# Altium PCB PCB2.PcbDoc
Units mm, origin at the board's own origin, x right, y up, seen from the top; angles counter-clockwise.
Board outline 28 x 43 mm, 2 copper layers (Top Layer, Bottom Layer); 46 components, 38 nets, 124 pads, 20 vias.
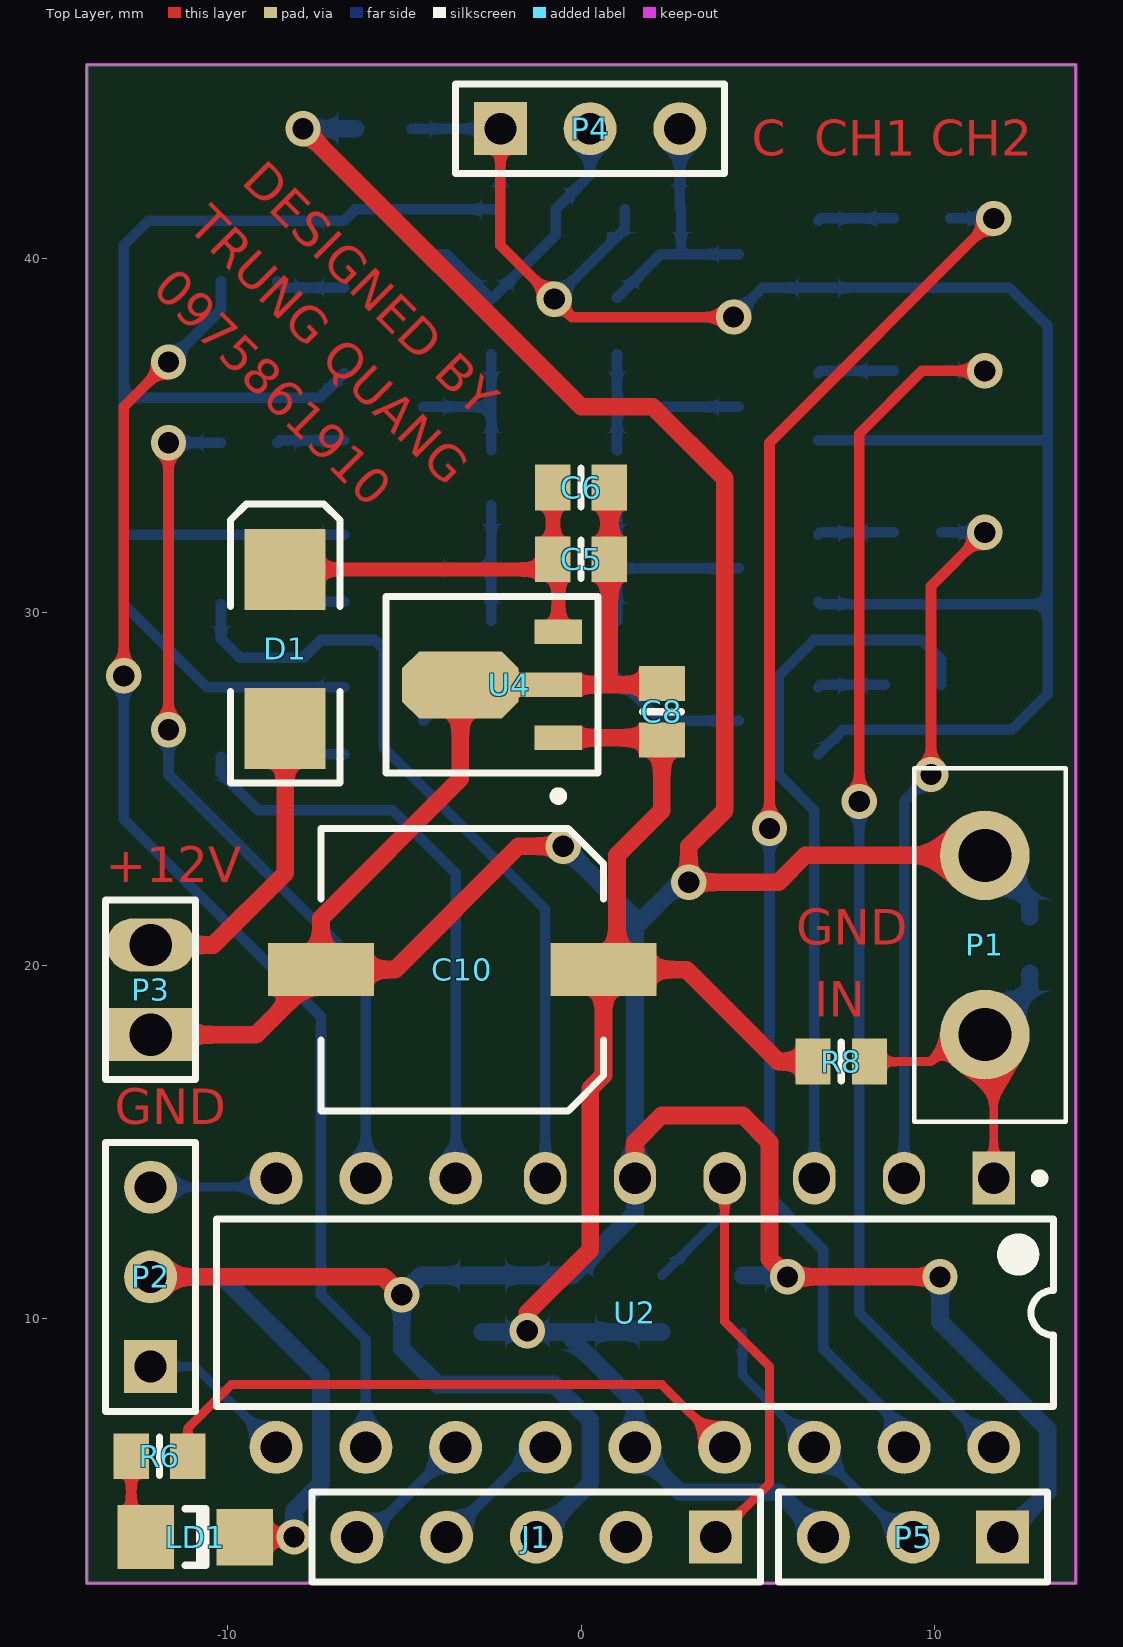
[diagram p0: Top Layer view]
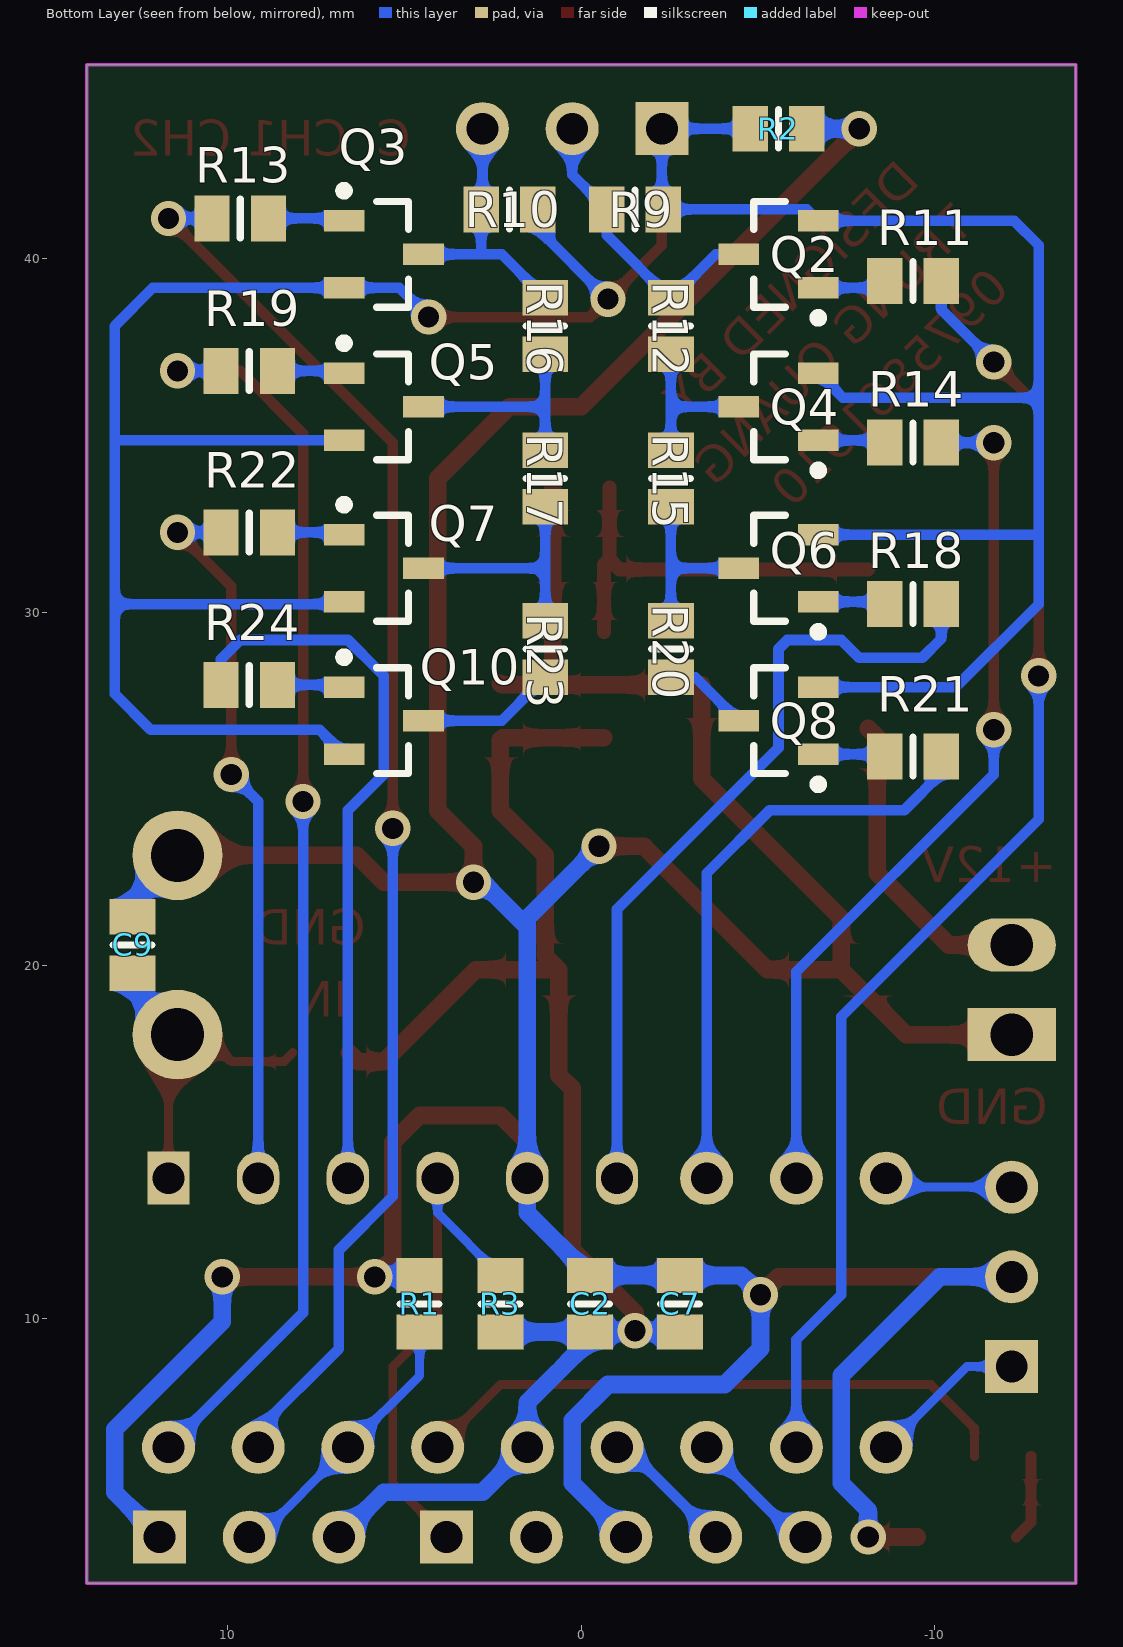
[diagram p1: Bottom Layer view, seen from below]

## Layer stack, top to bottom
Top Solder: solder mask 0.0102, Solder Resist, Dk 3.5
Top Layer: signal copper 0.0356
Dielectric1: dielectric 0.32, FR-4, Dk 4.8
Bottom Layer: signal copper 0.0356
Bottom Solder: solder mask 0.0102, Solder Resist, Dk 3.5

## Board outline
-14,2.5 -14,45.5 14,45.5 14,2.5

## Design rules (kind name [scope] priority, off if disabled: settings)
Clearance [All] p1: gap=0.254
HoleToHoleClearance [All] p1 off: gap=0.254 allowstackedmicrovias=TRUE
MinimumSolderMaskSliver [All] p1 off: minsoldermaskwidth=0.254
PolygonConnect [All] p1: connectstyle=Direct reliefconductorwidth=0.254 reliefentries=4 polygonreliefangle="90 Angle" airgapwidth=0.254
RoutingVias [All] p1: holewidth=0.711 width=1.27 viastyle="Through Hole" minholewidth=0.5 minwidth=1 maxholewidth=3 maxwidth=2
SilkToSolderMaskClearance SilkscreenOverComponentPads [IsPad] p1 off: minsilkscreentomaskgap=0.254 clearancetoexposedcopper=TRUE
SolderMaskExpansion [All] p1: expansion=0.102
Width [All] p1: maxlimit=2 minlimit=0.254 preferedwidth=0.3
27 further rules are at their usual default settings.

## Components (designator, comment, footprint, x,y, rotation, side; value= is the part's Value field where it differs from the comment)
C2 "Cap Semi" RESC2012L -0.254,10.414 r270 bottom
C5 "Cap Semi" RESC2012L 0,31.496 r180 top
C6 "Cap Semi" RESC2012L 0,33.528 r180 top
C7 "Cap Semi" RESC2012L -2.794,10.414 r270 bottom
C8 "Cap Semi" RESC2012L 2.286,27.178 r270 top
C9 "Cap Semi" RESC2012L 12.7,20.574 r270 bottom
C10 "EEE-FT1A102AP" CAP8x8 -7.366,23.876 r0 top
D1 "SS34" SMB -8.382,28.956 r270 top
J1 "programer" HDR1x5 3.81,3.81 r180 top
LD1 "LNJ911W8BRU" CD3216-1206 -10.922,3.81 r0 top
P1 "Header 2" CON_PLUG2 11.43,20.574 r90 top locked
P2 "Header 3" HDR1X3 -12.192,8.636 r90 top
P3 "Header 2" HDR1X2 -12.192,18.034 r90 top
P4 "tocdplayer" HDR1X3 -2.286,43.688 r0 top
P5 "JUMP" HDR1X3 11.938,3.81 r180 top
Q2 "NPN" SOT-23B -5.588,40.132 r180 bottom
Q3 "NPN" SOT-23B 5.588,40.132 r0 bottom
Q4 "NPN" SOT-23B -5.588,35.814 r180 bottom
Q5 "NPN" SOT-23B 5.588,35.814 r0 bottom
Q6 "NPN" SOT-23B -5.588,31.242 r180 bottom
Q7 "NPN" SOT-23B 5.588,31.242 r0 bottom
Q8 "NPN" SOT-23B -5.588,26.924 r180 bottom
Q10 "NPN" SOT-23B 5.588,26.924 r0 bottom
R1 "Res3" RESC2012L 4.572,10.414 r90 bottom
R2 "Res3" RESC2012L -5.588,43.688 r180 bottom
R3 "Res3" RESC2012L 2.286,10.414 r90 bottom
R6 "Res3" RESC2012L -11.938,6.096 r180 top
R8 "Res3" RESC2012L 7.366,17.272 r0 top
R9 "Res3" RESC2012L -1.524,41.402 r0 bottom
R10 "Res3" RESC2012L 2.032,41.402 r0 bottom
R11 "Res3" RESC2012L -9.398,39.37 r0 bottom
R12 "Res3" RESC2012L -2.54,38.1 r90 bottom
R13 "Res3" RESC2012L 9.652,41.148 r0 bottom
R14 "Res3" RESC2012L -9.398,34.798 r0 bottom
R15 "Res3" RESC2012L -2.54,33.782 r90 bottom
R16 "Res3" RESC2012L 1.016,38.1 r90 bottom
R17 "Res3" RESC2012L 1.016,33.782 r90 bottom
R18 "Res3" RESC2012L -9.398,30.226 r0 bottom
R19 "Res3" RESC2012L 9.398,36.83 r0 bottom
R20 "Res3" RESC2012L -2.54,28.956 r90 bottom
R21 "Res3" RESC2012L -9.398,25.908 r0 bottom
R22 "Res3" RESC2012L 9.398,32.258 r0 bottom
R23 "Res3" RESC2012L 1.016,28.956 r90 bottom
R24 "Res3" RESC2012L 9.398,27.94 r0 bottom
U2 "PIC18F1220-E/P" PDIP300-P18 1.524,10.16 r270 top locked
U4 "µA78L05ACPKR" PK03 -2.032,27.94 r270 top

## Footprints (in the part's own frame and the unit in brackets; to place one, negate y for a bottom-side part, rotate by r counter-clockwise, add the part's x,y. Pads: shape width x height; smd on the part's side, far side on the other; paste and mask are expansions set on the pad)
CAP8x8 [mm]
  rect 3x1.5 smd: 1(8,-4) 2(0,-4)
  silkscreen extent 0,-8 8,0
CD3216-1206 [mm] "Chip Diode; Body 3.2 x 1.6 mm (LxW typ)"
  rect 1.6x1.8 smd: 1(-1.4,0)
  rect 1.6x1.6 smd: 2(1.4,0)
  silkscreen extent -0.3,-0.8 0.3,0.8
CON_PLUG2 [mm]
  round 2.54 hole 1.5: 1(-2.54,0) 2(2.54,0)
  silkscreen extent -5,-2.29 5,2
HDR1X2 [mm] "Connector; Header; 2 Position"
  rect 1.5x2.5 hole 1.2: 1(0,0)
  oval 1.5x2.5 hole 1.2: 2(2.54,0)
  silkscreen extent -1.27,-1.27 3.81,1.27
HDR1X3 [mm] "Connector; Header; 3 Position"
  rect 1.5x1.5 hole 0.9: 1(0,0)
  round 1.5 hole 0.9: 2(2.54,0) 3(5.08,0)
  silkscreen extent -1.27,-1.27 6.35,1.27
HDR1x5 [mm] "Connector; Header; 5 Position"
  rect 1.5x1.5 hole 0.9: 1(0,0)
  round 1.5 hole 0.9: 2(2.54,0) 3(5.08,0) 4(7.62,0) 5(10.16,0)
  silkscreen extent -1.27,-1.27 11.43,1.27
PDIP300-P18 [mm] "DIP, 18-Leads, Row Spacing 7.62mm, Pitch 2.54mm, Body 22.9x6.6mm"
  rect 1.5x1.2 hole 0.9: 1(-3.81,10.16)
  oval 1.5x1.2 hole 0.9: 2(-3.81,7.62) 3(-3.81,5.08) 4(-3.81,2.54) 5(-3.81,0) 6(-3.81,-2.54)
  round 1.5 hole 0.9: 7(-3.81,-5.08) 8(-3.81,-7.62) 9(-3.81,-10.16) 10(3.81,-10.16) 11(3.81,-7.62) 12(3.81,-5.08) 13(3.81,-2.54) 14(3.81,0) 15(3.81,2.54) 16(3.81,5.08) 17(3.81,7.62) 18(3.81,10.16)
  silkscreen extent -3.93,-11.85 2.65,11.85, body extent -3.6,-11.8 3.6,11.8, height 5.34
PK03 [mm] "SOT-89; Body 4.6 x 4.25 mm, inc. leads (LxW max)"
  rect 0.7x1.35 smd: 1(1.5,1.388) 3(-1.5,1.388)
  rect 0.7x1.8 smd: 2(0,1.162)
  oct 1.9x3.3 smd: 4(0,-1.388)
  silkscreen extent -2.5,-3.49 3.27,2.51
RESC2012L [mm] "Chip Resistor, Body 2.0x1.3mm, IPC High Density"
  rect 1x1.3 smd: 1(-0.8,0) 2(0.8,0)
  silkscreen extent 0,-0.55 0,0.55, body extent -1.07,-0.7 1.07,0.7, height 0.65
SMB [mm] "DO-214-AA/SMB; 2 C-Bend Leads; Body 5.3 x 3.6 mm, inc. leads (LxW)"
  rect 2.3x2.3 smd: 1(2.25,0) 2(-2.25,0)
  silkscreen extent -4.1,-1.55 3.8,1.55
SOT-23B [mm] "SOT23, 3-Leads, Body 2.9x1.3mm, Pitch 0.95mm, Lead Span 2.4mm, IPC Medium Density"
  rect 1.15x0.6 smd: 1(-1.125,0) 2(1.125,-0.95) 3(1.125,0.95)
  silkscreen extent -0.7,-1.92 1.25,1.5, body extent -0.7,-1.5 0.7,1.5, height 1.14

## Part data
C2 C5 C6 C7 C8 C9: "Capacitor (Semiconductor SIM Model)"
C10: library part "Cap Pol1", "CAP ALUM 1000UF 10V 20% SMD"
D1: library part "D Schottky SS34", "DIODE SCHOTTKY 40V 3A SMC"
J1: library part CON5, "Connector"
LD1: library part LEDRED1206, "LED BLUE THRU BOARD 1206"
P1 P3: "Header, 2-Pin"
P2: "Header, 3-Pin"
P4 P5: library part "Header 3", "Header, 3-Pin"
Q2 Q3 Q4 Q5 Q6 Q7 Q8 Q10: "NPN Bipolar Transistor"
R1 R2 R3 R6 R8 R9 R10 R11 R12 R13 R14 R15 R16 R17 R18 R19 R20 R21 R22 R23 R24: "Resistor"
U2: "High Performance, Enhanced Flash Microcontroller with 10-Bit A/D and nanoWatt Technology, 4K Flash, 18-Pin PDIP, Extended Temperature"
U4: "Positive-Voltage Regulator"

## Via types
v1: diameter 1, hole 0.6, Top Layer to Bottom Layer, 20 vias

## Nets (pads, with @x,y where several pads share a name; then routed paths per layer and width w, separated by ;. In a path a pad name is that pad's centre, name@x,y a point inside that pad or via, vN(x,y) a via of type N, cw(c..) or ccw(c..) an arc to the next point about the centre after c; other vN are vias at no path point)
+5V: C2.2 C7.2 C8.2 C10.1 P5.3 R3.1 R8.1 U2.14 U4.1 | length 43.8
  Top Layer w0.5: v1(-1.524,9.652) -1.524,10.16 0.254,11.938 0.254,16.51 0.634,16.89 C10.1 ; U4.1 2.224,26.44 C8.2 2.286,24.384 1.016,23.114 1.016,20.258 C10.1 ; R8.1@6.566,17.526 6.312,17.272 5.588,17.272 2.984,19.876 C10.1
  Bottom Layer w0.5: C7.2 C2.2 ; R3.1 C2.2 ; P5.3 5.588,5.08 2.794,5.08 U2.14 1.524,7.62 -0.254,9.398 C2.2
+12V: D1.1 P3.2 | length 8.9
  Top Layer w0.5: P3.2 -10.414,20.574 -8.382,22.606 -8.382,26.452 D1.1@-8.128,26.706
CALL_OFF: R14.1 U2.8 | length 24.6
  Top Layer w0.3: v1(-11.684,26.67) v1(-11.684,34.798)
  Bottom Layer w0.3: v1(-11.684,26.67) -11.684,25.4 -6.096,19.812 U2.8 ; v1(-11.684,34.798) R14.1
CALL_ON: R18.1 U2.6 | length 23
  Bottom Layer w0.3: R18.1 -10.198,29.248 -9.652,28.702 -7.874,28.702 -7.366,29.21 -5.842,29.21 -5.588,28.956 -5.588,26.162 -1.016,21.59 U2.6
COM_CH1: P4.2 Q2.1 R9.2 R12.2 | length 8.4
  Bottom Layer w0.3: Q2.1 -3.81,40.132 -2.54,38.862 -0.724,40.678 R9.2 0.254,42.38 P4.2
COM_CH2: P4.3 Q3.1 R10.2 R16.2 | length 7.5
  Bottom Layer w0.3: R16.2 2.248,40.132 2.794,40.132 ; P4.3 2.794,41.44 R10.2 2.832,40.17 2.794,40.132 ; Q3.1 2.794,40.132
COM_SWC: P4.1 Q2.3 Q3.3 Q4.3 Q5.3 Q6.3 Q7.3 Q8.3 Q10.3 R2.1 R9.1 R10.1 | length 100.5
  Top Layer w0.3: P4.1 -2.286,40.386 v1(-0.762,38.862) -0.254,38.354 v1(4.318,38.354)
  Bottom Layer w0.3: -12.954,36.068 -7.409,36.068 Q4.3 ; Q8.3 -10.602,27.874 -12.954,30.226 -12.954,32.258 ; Q6.3 -12.888,32.192 -12.954,32.258 ; R2.1 P4.1 -2.286,41.44 R9.1 -6.393,41.402 Q2.3 -12.258,41.082 -12.954,40.386 -12.954,32.258 ; v1(-0.762,38.862) 1.232,40.856 R10.1 ; v1(4.318,38.354) 5.146,39.182 Q3.3 12.126,39.182 13.208,38.1 13.208,34.798 ; Q10.3 7.409,26.67 12.192,26.67 13.208,27.686 13.208,30.226 ; Q7.3 6.779,30.226 13.208,30.226 ; Q5.3 12.192,34.864 13.142,34.864 13.208,34.798 ; 13.208,30.226 13.208,34.798
GND: C2.1 C5.1 C6.1 C7.1 C8.1 C9.1 C10.2 J1.3 LD1.2 P1.2 P2.2 P3.1 P5.1 R1.2 R2.2 U2.5 U4.2 U4.4 | length 151.5
  Top Layer w0.5: P2.2 -5.588,11.176 v1(-5.08,10.668) ; P3.1 -9.208,18.034 C10.2 ; LD1.2 v1(-8.128,3.81) ; v1(-7.874,43.688) 0,35.814 2.032,35.814 4.064,33.782 4.064,24.384 3.048,23.368 v1(3.048,22.352) 5.588,22.352 6.35,23.114 P1.2 ; U4.2 0.762,27.94 ; U4.2 U4.4 -3.42,25.282 -7.366,21.336 C10.2 ; v1(-0.508,23.368) -1.778,23.368 -5.27,19.876 C10.2 ; C6.1 C5.1 0.8,27.978 0.762,27.94 ; U2.5 1.524,14.986 2.286,15.748 4.572,15.748 5.334,14.986 5.334,11.684 v1(5.842,11.176) v1(10.16,11.176) ; C8.1 2.248,27.94 0.762,27.94
  Bottom Layer w0.5: P2.2 -10.16,11.176 -7.366,8.382 -7.366,5.334 -8.128,4.572 v1(-8.128,3.81) ; v1(-7.874,43.688) R2.2 ; J1.3 0.254,5.334 0.254,7.112 -0.762,8.128 -4.064,8.128 -5.08,9.144 v1(-5.08,10.668) -4.534,11.214 C7.1 C2.1 1.524,12.992 U2.5 1.524,21.082 ; v1(-0.508,23.368) 1.524,21.336 1.524,21.082 ; v1(3.048,22.352) 2.794,22.352 1.524,21.082 ; R1.2 5.804,11.214 v1(5.842,11.176) ; v1(10.16,11.176) 10.16,9.906 13.208,6.858 13.208,5.08 P5.1 ; P1.2 12.7,21.844 C9.1
LEAN_CMD: P5.2 R1.1 U2.16 | length 8
  Bottom Layer w0.254: R1.1 4.572,8.382 U2.16 9.144,3.81 P5.2
MODE: R11.1 U2.11 | length 37
  Top Layer w0.3: v1(-12.954,28.194) -12.954,35.814 v1(-11.684,37.084)
  Bottom Layer w0.3: v1(-12.954,28.194) -12.954,24.13 -7.366,18.542 -7.366,10.668 -6.096,9.398 U2.11 ; v1(-11.684,37.084) -10.198,38.57 R11.1
NetC5_2: C5.2 C6.2 D1.2 U4.3 | length 11.6
  Top Layer w0.4: D1.2@-8.128,31.206 -1.09,31.206 C5.2 ; C6.2 C5.2 ; U4.3 -0.644,31.34 C5.2
NetC9_2: C9.2 P1.1 R8.2 U2.1 | length 10.3
  Top Layer w0.254: R8.2@8.166,17.526 8.42,17.272 9.906,17.272 10.922,18.288 11.176,18.288 P1.1 11.684,17.78 U2.1
  Bottom Layer w0.5: P1.1 12.7,19.304 C9.2
NetLD1_1: LD1.1 R6.2 | length 2.5
  Top Layer w0.3: R6.2 -12.738,4.226 LD1.1
NetQ2_2: Q2.2 R11.2 | length 2
  Bottom Layer w0.3: R11.2 -8.41,39.182 Q2.2
NetQ3_2: Q3.2 R13.1 | length 2.2
  Bottom Layer w0.3: Q3.2 6.779,41.148 R13.1
NetQ4_1: Q4.1 R12.1 R15.2 | length 4.6
  Bottom Layer w0.3: Q4.1 -2.54,35.814 ; R15.2 -2.54,35.814 ; R12.1 -2.54,35.814
NetQ4_2: Q4.2 R14.2 | length 1.9
  Bottom Layer w0.3: R14.2 -8.532,34.864 Q4.2
NetQ5_1: Q5.1 R16.1 R17.2 | length 6.2
  Bottom Layer w0.3: R17.2 1.016,35.814 ; R16.1 1.016,35.814 ; Q5.1 1.016,35.814
NetQ5_2: Q5.2 R19.1 | length 2.2
  Bottom Layer w0.3: Q5.2 6.779,36.83 R19.1@8.852,36.83
NetQ6_1: Q6.1 R15.1 R20.2 | length 5.2
  Bottom Layer w0.3: Q6.1 -2.54,31.242 ; R20.2 -2.54,31.242 ; R15.1@-2.54,33.02 -2.54,31.242
NetQ6_2: Q6.2 R18.2 | length 1.9
  Bottom Layer w0.3: R18.2 -8.532,30.292 Q6.2
NetQ7_1: Q7.1 R17.1 R23.2 | length 6.7
  Bottom Layer w0.3: R23.2 1.016,31.242 ; R17.1 1.016,31.242 ; Q7.1 1.016,31.242
NetQ7_2: Q7.2 R22.1 | length 2.2
  Bottom Layer w0.3: Q7.2 6.779,32.258 R22.1@8.852,32.258
NetQ8_1: Q8.1 R20.1 | length 2.4
  Bottom Layer w0.3: Q8.1 -3.231,28.156 R20.1
NetQ8_2: Q8.2 R21.2 | length 1.9
  Bottom Layer w0.3: R21.2 -8.532,25.974 Q8.2
NetQ10_1: Q10.1 R23.1 | length 4
  Bottom Layer w0.3: R23.1 2.248,26.924 Q10.1
NetQ10_2: Q10.2 R24.1 | length 1.9
  Bottom Layer w0.3: Q10.2 6.779,27.94 R24.1
PGC: J1.5 U2.12 | length 3.8
  Bottom Layer w0.3: J1.5 -6.096,3.81 U2.12
PGD: J1.4 U2.13 | length 3.8
  Bottom Layer w0.3: J1.4 -1.27,6.35 U2.13
RST: J1.1 R3.2 U2.4 | length 14.8
  Top Layer w0.254: J1.1 5.334,5.334 5.334,8.636 4.064,9.906 U2.4
  Bottom Layer w0.254: R3.2 4.064,12.992 U2.4
RX: P2.1 U2.10 | length 4.5
  Bottom Layer w0.254: P2.1 -10.922,8.636 U2.10
SEEK+: R13.2 U2.17 | length 40.2
  Top Layer w0.3: v1(5.334,23.876) 5.334,34.798 v1(11.684,41.148)
  Bottom Layer w0.3: v1(5.334,23.876) 5.334,13.462 6.858,11.938 6.858,9.144 9.144,6.858 U2.17 ; R13.2 v1(11.684,41.148)
SEEK-: R19.2 U2.18 | length 35.8
  Top Layer w0.3: v1(7.874,24.638) 7.874,35.052 9.652,36.83 v1(11.43,36.83)
  Bottom Layer w0.3: v1(7.874,24.638) 7.874,10.16 U2.18 ; R19.2 v1(11.43,36.83)
STATUS: R6.1 U2.15 | length 17.2
  Top Layer w0.254: R6.1 -11.138,6.896 -9.906,8.128 2.286,8.128 U2.15
TX: P2.3 U2.9 | length 3.8
  Bottom Layer w0.254: P2.3 -8.636,13.716 U2.9
VOICE: R21.1 U2.7 | length 16.9
  Bottom Layer w0.3: R21.1 -10.198,25.438 -9.144,24.384 -5.334,24.384 -3.556,22.606 U2.7
VOL+: R22.2 U2.2 | length 20.5
  Top Layer w0.3: v1(9.906,25.4) 9.906,30.734 v1(11.43,32.258)
  Bottom Layer w0.3: U2.2 9.144,24.638 v1(9.906,25.4) ; R22.2 v1(11.43,32.258)
VOL-: R24.2 U2.3 | length 20.6
  Bottom Layer w0.3: U2.3 6.604,24.384 5.588,25.4 5.588,28.194 5.734,28.34 5.734,28.341 6.603,29.21 9.652,29.21 10.198,28.664 R24.2
pads on no net: J1.2

## Keep-outs
Keep-Out Layer:
  the board outline again, w0.1

## Other copper
Top Layer:
  text "C" at 4.826,43.942 h1 r180
  text "CH1" at 6.604,42.926 h1
  text "CH2" at 9.906,42.926 h1
  text "DESIGNED BY" at -9.652,42.164 h1 r315
  text "TRUNG QUANG" at -11.176,40.894 h1 r315
  text "0975861910" at -12.192,39.116 h1 r315
  text "+12V" at -13.462,22.352 h1
  text "GND" at 6.096,20.574 h1
  text "IN" at 6.604,18.542 h1
  text "GND" at -13.208,15.494 h1

## Silkscreen, mask and mechanical layers (free items; w line width, h text height)
Mechanical 1:
  circle w0.1: c0,19 r1.75
  lines w0.1: -17,0 17,0 17,48 -17,48 -17,0